# Altium PCB SEG_pressure gauge_up  V2.1.PcbDoc (part 4 of 5)
Units mm, origin at the board's own origin, x right, y up, seen from the top; angles counter-clockwise.
Board outline 67.74 x 67.74 mm, 2 copper layers (Top Layer, Bottom Layer); 36 components, 59 nets, 200 pads, 20 vias.
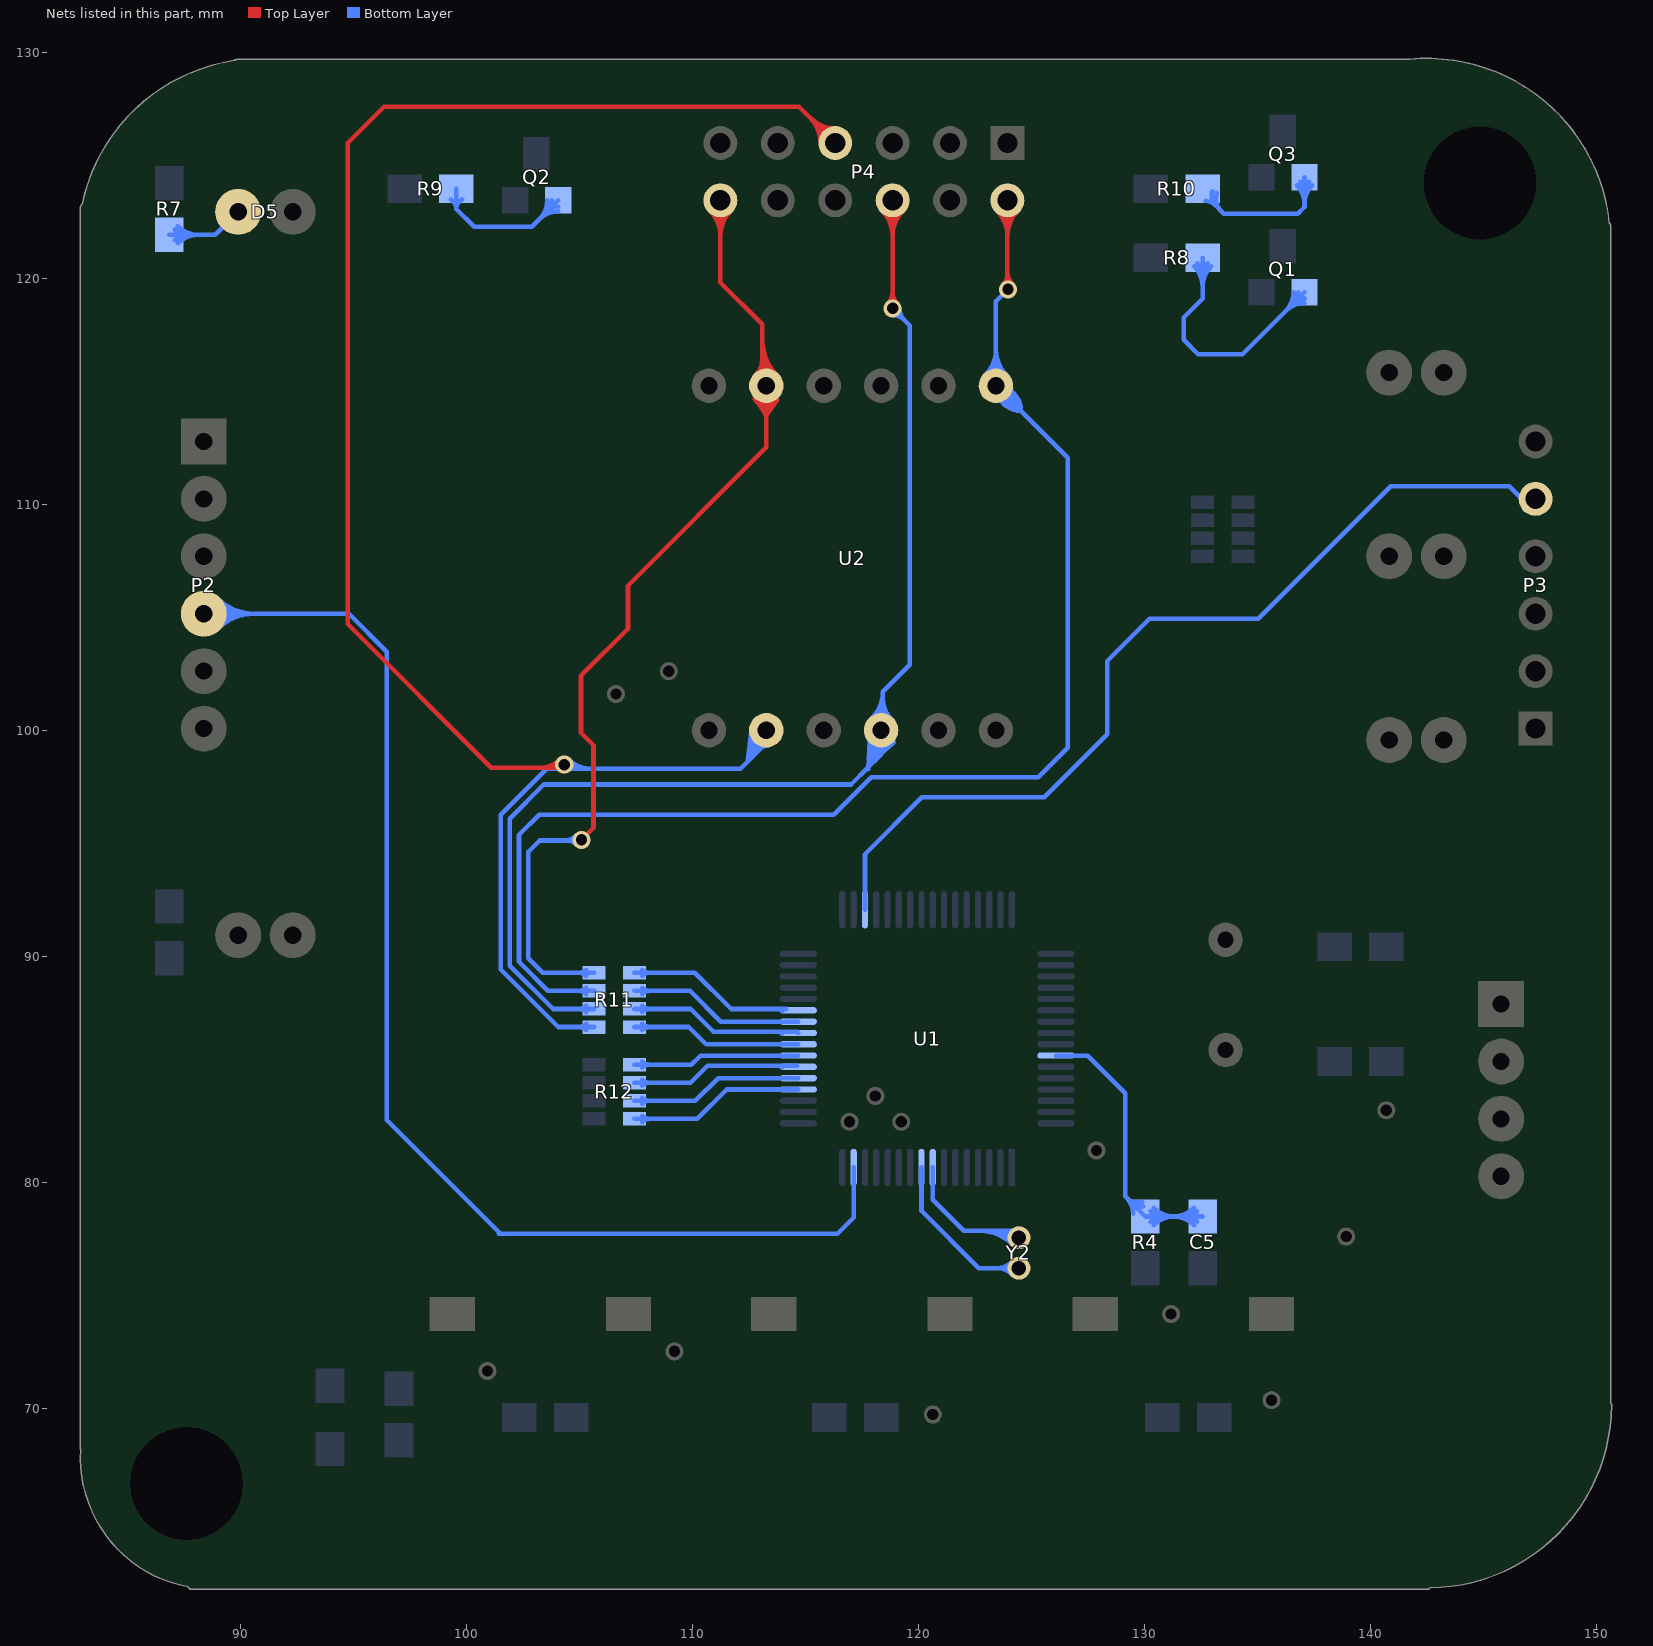
[diagram p4: the nets of this part, all layers, seen from the top]

## Via types
v1: diameter 0.8, hole 0.5, Top Layer to Bottom Layer, 20 vias

## Nets (pads, with @x,y where several pads share a name; then routed paths per layer and width w, separated by ;. In a path a pad name is that pad's centre, name@x,y a point inside that pad or via, vN(x,y) a via of type N, cw(c..) or ccw(c..) an arc to the next point about the centre after c; other vN are vias at no path point) (continued)
NetD5_1: D5.1 R7.2 | length 19.8
  Bottom Layer w0.203: R7.2@86.868,121.92 88.9,121.92 D5.1@89.916,122.936 ; R7.2@87.101,121.687 cw(c87.665,121.123) 87.665,121.92 ; R7.2@87.101,121.687 cw(c87.665,121.123) 87.665,121.92 ; R7.2@87.101,121.687 cw(c87.665,121.123) 87.665,121.92 ; R7.2@87.101,121.687 cw(c87.665,121.123) 87.665,121.92 ; R7.2@87.101,121.687 cw(c87.665,121.123) 87.665,121.92 ; R7.2@87.101,122.153 ccw(c87.665,122.717) 87.665,121.92 ; R7.2@87.101,122.153 ccw(c87.665,122.717) 87.665,121.92 ; R7.2@87.101,122.153 ccw(c87.665,122.717) 87.665,121.92 ; R7.2@87.101,122.153 ccw(c87.665,122.717) 87.665,121.92 ; R7.2@87.101,122.153 ccw(c87.665,122.717) 87.665,121.92 ; R7.2@87.245,121.543 cw(c88.156,120.632) 88.156,121.92 ; R7.2@87.245,121.543 cw(c88.156,120.632) 88.156,121.92 ; R7.2@87.245,121.543 cw(c88.156,120.632) 88.156,121.92 ; R7.2@87.245,121.543 cw(c88.156,120.632) 88.156,121.92 ; R7.2@87.245,121.543 cw(c88.156,120.632) 88.156,121.92 ; R7.2@87.245,122.297 ccw(c88.156,123.208) 88.156,121.92 ; R7.2@87.245,122.297 ccw(c88.156,123.208) 88.156,121.92 ; R7.2@87.245,122.297 ccw(c88.156,123.208) 88.156,121.92 ; R7.2@87.245,122.297 ccw(c88.156,123.208) 88.156,121.92 ; R7.2@87.245,122.297 ccw(c88.156,123.208) 88.156,121.92
NetQ1_1: Q1.1 R8.1 | length 35
  Bottom Layer w0.203: R8.1@132.588,120.904 132.588,119.101 131.75,118.262 131.75,117.272 132.385,116.637 134.353,116.637 Q1.1@137.096,119.38 ; R8.1@132.211,120.527 cw(c131.3,119.616) 132.588,119.616 ; R8.1@132.211,120.527 cw(c131.3,119.616) 132.588,119.616 ; R8.1@132.211,120.527 cw(c131.3,119.616) 132.588,119.616 ; R8.1@132.355,120.671 cw(c131.791,120.107) 132.588,120.107 ; R8.1@132.355,120.671 cw(c131.791,120.107) 132.588,120.107 ; R8.1@132.355,120.671 cw(c131.791,120.107) 132.588,120.107 ; 132.588,119.616 cw(c133.876,119.616) R8.1@132.965,120.527 ; 132.588,119.616 cw(c133.876,119.616) R8.1@132.965,120.527 ; 132.588,119.616 cw(c133.876,119.616) R8.1@132.965,120.527 ; 132.588,120.107 cw(c133.385,120.107) R8.1@132.821,120.671 ; 132.588,120.107 cw(c133.385,120.107) R8.1@132.821,120.671 ; 132.588,120.107 cw(c133.385,120.107) R8.1@132.821,120.671 ; 136.273,118.556 cw(c137.096,117.732) Q1.1@137.096,118.897 ; 136.273,118.556 ccw(c135.449,119.38) Q1.1@136.614,119.38 ; 136.273,118.556 cw(c137.096,117.732) Q1.1@137.096,118.897 ; 136.273,118.556 ccw(c135.449,119.38) Q1.1@136.614,119.38 ; 136.273,118.556 cw(c137.096,117.732) Q1.1@137.096,118.897 ; 136.273,118.556 ccw(c135.449,119.38) Q1.1@136.614,119.38 ; 136.273,118.556 cw(c137.096,117.732) Q1.1@137.096,118.897 ; 136.273,118.556 ccw(c135.449,119.38) Q1.1@136.614,119.38 ; 136.273,118.556 ccw(c135.449,119.38) Q1.1@136.614,119.38 ; 136.273,118.556 cw(c137.096,117.732) Q1.1@137.096,118.897 ; Q1.1@136.62,118.903 cw(c137.096,118.426) Q1.1@137.096,119.101 ; Q1.1@136.62,118.903 ccw(c136.143,119.38) Q1.1@136.817,119.38 ; Q1.1@136.62,118.903 cw(c137.096,118.426) Q1.1@137.096,119.101 ; Q1.1@136.62,118.903 ccw(c136.143,119.38) Q1.1@136.817,119.38 ; Q1.1@136.62,118.903 cw(c137.096,118.426) Q1.1@137.096,119.101 ; Q1.1@136.62,118.903 ccw(c136.143,119.38) Q1.1@136.817,119.38 ; Q1.1@136.62,118.903 cw(c137.096,118.426) Q1.1@137.096,119.101 ; Q1.1@136.62,118.903 ccw(c136.143,119.38) Q1.1@136.817,119.38 ; Q1.1@136.62,118.903 ccw(c136.143,119.38) Q1.1@136.817,119.38 ; Q1.1@136.62,118.903 cw(c137.096,118.426) Q1.1@137.096,119.101
NetQ2_1: Q2.1 R9.1 | length 25.8
  Bottom Layer w0.203: R9.1@99.568,123.952 99.568,123.063 ; Q2.1@104.076,123.444 102.908,122.276 100.355,122.276 99.568,123.063 ; R9.1@99.317,123.481 cw(c99.094,123.063) 99.568,123.063 ; R9.1@99.317,123.481 cw(c99.094,123.063) 99.568,123.063 ; R9.1@99.317,123.481 cw(c99.094,123.063) 99.568,123.063 ; R9.1@99.317,123.481 cw(c99.094,123.063) 99.568,123.063 ; R9.1@99.317,123.481 cw(c99.094,123.063) 99.568,123.063 ; 99.568,123.063 cw(c100.042,123.063) R9.1@99.819,123.481 ; 99.568,123.063 cw(c100.042,123.063) R9.1@99.819,123.481 ; 99.568,123.063 cw(c100.042,123.063) R9.1@99.819,123.481 ; 99.568,123.063 cw(c100.042,123.063) R9.1@99.819,123.481 ; 99.568,123.063 cw(c100.042,123.063) R9.1@99.819,123.481 ; 103.253,122.62 cw(c104.076,121.796) Q2.1@104.076,122.961 ; 103.253,122.62 ccw(c102.429,123.444) Q2.1@103.594,123.444 ; 103.253,122.62 cw(c104.076,121.796) Q2.1@104.076,122.961 ; 103.253,122.62 ccw(c102.429,123.444) Q2.1@103.594,123.444 ; 103.253,122.62 cw(c104.076,121.796) Q2.1@104.076,122.961 ; 103.253,122.62 ccw(c102.429,123.444) Q2.1@103.594,123.444 ; 103.253,122.62 cw(c104.076,121.796) Q2.1@104.076,122.961 ; 103.253,122.62 ccw(c102.429,123.444) Q2.1@103.594,123.444 ; 103.253,122.62 ccw(c102.429,123.444) Q2.1@103.594,123.444 ; 103.253,122.62 cw(c104.076,121.796) Q2.1@104.076,122.961 ; Q2.1@103.6,122.967 cw(c104.076,122.49) Q2.1@104.076,123.165 ; Q2.1@103.6,122.967 ccw(c103.123,123.444) Q2.1@103.797,123.444 ; Q2.1@103.6,122.967 cw(c104.076,122.49) Q2.1@104.076,123.165 ; Q2.1@103.6,122.967 ccw(c103.123,123.444) Q2.1@103.797,123.444 ; Q2.1@103.6,122.967 cw(c104.076,122.49) Q2.1@104.076,123.165 ; Q2.1@103.6,122.967 ccw(c103.123,123.444) Q2.1@103.797,123.444 ; Q2.1@103.6,122.967 cw(c104.076,122.49) Q2.1@104.076,123.165 ; Q2.1@103.6,122.967 ccw(c103.123,123.444) Q2.1@103.797,123.444 ; Q2.1@103.6,122.967 ccw(c103.123,123.444) Q2.1@103.797,123.444 ; Q2.1@103.6,122.967 cw(c104.076,122.49) Q2.1@104.076,123.165
NetQ3_1: Q3.1 R10.1 | length 30
  Bottom Layer w0.203: 133.096,123.292 133.528,122.86 136.804,122.86 137.096,123.152 Q3.1@137.096,124.46 ; R10.1@132.715,123.419 cw(c132.715,122.805) 133.149,123.239 ; R10.1@132.715,123.419 cw(c132.715,122.805) 133.149,123.239 ; R10.1@132.715,123.419 cw(c132.715,122.805) 133.149,123.239 ; R10.1@132.715,123.419 cw(c132.715,122.805) 133.149,123.239 ; R10.1@132.715,123.419 cw(c132.715,122.805) 133.149,123.239 ; R10.1@133.025,123.84 ccw(c133.577,123.64) 133.162,123.225 ; R10.1@133.025,123.84 ccw(c133.577,123.64) 133.162,123.225 ; R10.1@133.025,123.84 ccw(c133.577,123.64) 133.162,123.225 ; R10.1@133.025,123.84 ccw(c133.577,123.64) 133.162,123.225 ; R10.1@133.025,123.84 ccw(c133.577,123.64) 133.162,123.225 ; R10.1@133.217,123.77 ccw(c133.908,123.52) 133.388,123 ; R10.1@133.217,123.77 ccw(c133.908,123.52) 133.388,123 ; R10.1@133.217,123.77 ccw(c133.908,123.52) 133.388,123 ; R10.1@133.217,123.77 ccw(c133.908,123.52) 133.388,123 ; R10.1@133.217,123.77 ccw(c133.908,123.52) 133.388,123 ; Q3.1@136.755,124.119 cw(c135.931,123.295) 137.096,123.295 ; Q3.1@136.755,124.119 cw(c135.931,123.295) 137.096,123.295 ; Q3.1@136.755,124.119 cw(c135.931,123.295) 137.096,123.295 ; Q3.1@136.755,124.119 cw(c135.931,123.295) 137.096,123.295 ; Q3.1@136.755,124.119 cw(c135.931,123.295) 137.096,123.295 ; Q3.1@136.899,124.262 cw(c136.422,123.785) 137.096,123.785 ; Q3.1@136.899,124.262 cw(c136.422,123.785) 137.096,123.785 ; Q3.1@136.899,124.262 cw(c136.422,123.785) 137.096,123.785 ; Q3.1@136.899,124.262 cw(c136.422,123.785) 137.096,123.785 ; Q3.1@136.899,124.262 cw(c136.422,123.785) 137.096,123.785 ; 137.096,123.295 cw(c138.262,123.295) Q3.1@137.438,124.119 ; 137.096,123.295 cw(c138.262,123.295) Q3.1@137.438,124.119 ; 137.096,123.295 cw(c138.262,123.295) Q3.1@137.438,124.119 ; 137.096,123.295 cw(c138.262,123.295) Q3.1@137.438,124.119 ; 137.096,123.295 cw(c138.262,123.295) Q3.1@137.438,124.119 ; 137.096,123.785 cw(c137.771,123.785) Q3.1@137.294,124.262 ; 137.096,123.785 cw(c137.771,123.785) Q3.1@137.294,124.262 ; 137.096,123.785 cw(c137.771,123.785) Q3.1@137.294,124.262 ; 137.096,123.785 cw(c137.771,123.785) Q3.1@137.294,124.262 ; 137.096,123.785 cw(c137.771,123.785) Q3.1@137.294,124.262
NetU1_8: U1.8 Y2.2 | length 24
  Bottom Layer w0.203: U1.8@120.649,80.656 120.649,79.223 122.022,77.851 124.155,77.851 Y2.2@124.46,77.546 ; 122.743,77.851 cw(c122.743,75.829) Y2.2@124.173,77.259 ; 122.743,77.851 cw(c122.743,75.829) Y2.2@124.173,77.259 ; 122.743,77.851 cw(c122.743,75.829) Y2.2@124.173,77.259 ; 122.743,77.851 cw(c122.743,75.829) Y2.2@124.173,77.259 ; 122.743,77.851 cw(c122.743,75.829) Y2.2@124.173,77.259 ; 123.234,77.851 cw(c123.234,76.32) Y2.2@124.316,77.403 ; 123.234,77.851 cw(c123.234,76.32) Y2.2@124.316,77.403 ; 123.234,77.851 cw(c123.234,76.32) Y2.2@124.316,77.403 ; 123.234,77.851 cw(c123.234,76.32) Y2.2@124.316,77.403 ; 123.234,77.851 cw(c123.234,76.32) Y2.2@124.316,77.403 ; 123.724,77.851 cw(c123.724,76.81) Y2.2@124.46,77.546 ; 123.724,77.851 cw(c123.724,76.81) Y2.2@124.46,77.546 ; 123.724,77.851 cw(c123.724,76.81) Y2.2@124.46,77.546 ; 123.724,77.851 cw(c123.724,76.81) Y2.2@124.46,77.546 ; 123.724,77.851 cw(c123.724,76.81) Y2.2@124.46,77.546
NetU1_9: U1.9 Y2.1 | length 15
  Bottom Layer w0.203: U1.9@120.149,80.656 120.149,78.733 122.682,76.2 Y2.1@124.46,76.2 ; 123.479,76.2 cw(c123.479,75.219) Y2.1@124.173,75.913 ; 123.479,76.2 ccw(c123.479,77.181) Y2.1@124.173,76.487 ; 123.479,76.2 cw(c123.479,75.219) Y2.1@124.173,75.913 ; 123.479,76.2 ccw(c123.479,77.181) Y2.1@124.173,76.487 ; 123.479,76.2 cw(c123.479,75.219) Y2.1@124.173,75.913 ; 123.479,76.2 ccw(c123.479,77.181) Y2.1@124.173,76.487 ; 123.479,76.2 cw(c123.479,75.219) Y2.1@124.173,75.913 ; 123.479,76.2 ccw(c123.479,77.181) Y2.1@124.173,76.487 ; 123.479,76.2 ccw(c123.479,77.181) Y2.1@124.173,76.487 ; 123.479,76.2 cw(c123.479,75.219) Y2.1@124.173,75.913
P2.0: R12.2 U1.20 | length 8.5
  Bottom Layer w0.203: R12.2@107.442,82.804 110.236,82.804 111.538,84.106 U1.20@114.699,84.106 ; R12.2@107.79,82.664 cw(c108.129,82.325) 108.129,82.804 cw(c108.129,83.283) R12.2@107.79,82.944
P2.1: R12.4 U1.21 | length 8.4
  Bottom Layer w0.203: R12.4@107.442,83.604 110.147,83.604 111.149,84.606 U1.21@114.699,84.606 ; R12.4@107.79,83.464 cw(c108.129,83.125) 108.129,83.604 cw(c108.129,84.083) R12.4@107.79,83.744
P2.2: R12.6 U1.22 | length 8.5
  Bottom Layer w0.203: R12.6@107.442,84.404 109.931,84.404 110.691,85.164 U1.22@114.64,85.164 ; R12.6@107.79,84.264 cw(c108.129,83.925) 108.129,84.404 cw(c108.129,84.883) R12.6@107.79,84.544 ; 113.78,85.164 cw(c113.78,84.872) U1.22@113.986,85.079
P2.3: R12.8 U1.23 | length 8.2
  Bottom Layer w0.203: R12.8@107.442,85.204 109.969,85.204 110.371,85.606 U1.23@114.699,85.606 ; R12.8@107.79,85.064 cw(c108.129,84.725) 108.129,85.204 cw(c108.129,85.683) R12.8@107.79,85.344
P2.4: R11.2 U1.24 | length 8.3
  Bottom Layer w0.203: R11.2@107.442,86.868 109.855,86.868 110.617,86.106 U1.24@114.699,86.106 ; R11.2@107.79,86.728 cw(c108.129,86.389) 108.129,86.868 cw(c108.129,87.347) R11.2@107.79,87.008
P2.5: R11.4 U1.25 | length 8.7
  Bottom Layer w0.203: R11.4@107.442,87.668 109.944,87.668 110.948,86.664 114.641,86.664 U1.25@114.699,86.606 ; R11.4@107.79,87.528 cw(c108.129,87.189) 108.129,87.668 cw(c108.129,88.147) R11.4@107.79,87.808 ; 113.78,86.664 cw(c113.78,86.372) U1.25@113.986,86.579
P2.6: R11.6 U1.26 | length 8.6
  Bottom Layer w0.203: R11.6@107.442,88.468 109.906,88.468 111.268,87.106 U1.26@114.699,87.106 ; R11.6@107.79,88.328 cw(c108.129,87.989) 108.129,88.468 cw(c108.129,88.947) R11.6@107.79,88.608
P2.7: R11.8 U1.27 | length 8.4
  Bottom Layer w0.203: R11.8@107.442,89.268 110.122,89.268 111.726,87.664 U1.27@114.173,87.664 ; R11.8@107.79,89.128 cw(c108.129,88.789) 108.129,89.268 cw(c108.129,89.747) R11.8@107.79,89.408 ; 113.78,87.664 cw(c113.78,87.372) U1.27@113.986,87.579
PWM: P2.4 U1.15 | length 95.3
  Bottom Layer w0.203: P2.4@88.392,105.156 94.818,105.156 96.495,103.48 96.495,82.753 101.524,77.724 ; 101.448,77.724 101.524,77.724 ; U1.15@117.149,80.656 117.149,78.44 116.434,77.724 101.524,77.724 ; P2.4@88.751,104.797 cw(c89.618,103.93) 89.618,105.156 ; P2.4@88.751,104.797 cw(c89.618,103.93) 89.618,105.156 ; P2.4@88.751,104.797 cw(c89.618,103.93) 89.618,105.156 ; P2.4@88.751,104.797 cw(c89.618,103.93) 89.618,105.156 ; P2.4@88.751,104.797 cw(c89.618,103.93) 89.618,105.156 ; P2.4@88.751,105.515 ccw(c89.618,106.382) 89.618,105.156 ; P2.4@88.751,105.515 ccw(c89.618,106.382) 89.618,105.156 ; P2.4@88.751,105.515 ccw(c89.618,106.382) 89.618,105.156 ; P2.4@88.751,105.515 ccw(c89.618,106.382) 89.618,105.156 ; P2.4@88.751,105.515 ccw(c89.618,106.382) 89.618,105.156 ; P2.4@88.895,104.653 cw(c90.109,103.439) 90.109,105.156 ; P2.4@88.895,104.653 cw(c90.109,103.439) 90.109,105.156 ; P2.4@88.895,104.653 cw(c90.109,103.439) 90.109,105.156 ; P2.4@88.895,104.653 cw(c90.109,103.439) 90.109,105.156 ; P2.4@88.895,104.653 cw(c90.109,103.439) 90.109,105.156 ; P2.4@88.895,105.659 ccw(c90.109,106.873) 90.109,105.156 ; P2.4@88.895,105.659 ccw(c90.109,106.873) 90.109,105.156 ; P2.4@88.895,105.659 ccw(c90.109,106.873) 90.109,105.156 ; P2.4@88.895,105.659 ccw(c90.109,106.873) 90.109,105.156 ; P2.4@88.895,105.659 ccw(c90.109,106.873) 90.109,105.156 ; P2.4@89.039,104.509 cw(c90.6,102.948) 90.6,105.156 ; P2.4@89.039,104.509 cw(c90.6,102.948) 90.6,105.156 ; P2.4@89.039,104.509 cw(c90.6,102.948) 90.6,105.156 ; P2.4@89.039,104.509 cw(c90.6,102.948) 90.6,105.156 ; P2.4@89.039,104.509 cw(c90.6,102.948) 90.6,105.156 ; P2.4@89.039,105.803 ccw(c90.6,107.364) 90.6,105.156 ; P2.4@89.039,105.803 ccw(c90.6,107.364) 90.6,105.156 ; P2.4@89.039,105.803 ccw(c90.6,107.364) 90.6,105.156 ; P2.4@89.039,105.803 ccw(c90.6,107.364) 90.6,105.156 ; P2.4@89.039,105.803 ccw(c90.6,107.364) 90.6,105.156
RST: C5.2 R4.2 U1.58 | length 55.1
  Bottom Layer w0.203: U1.58@126.099,85.606 127.5,85.606 129.159,83.947 129.159,79.375 R4.2@130.048,78.486 C5.2@132.588,78.486 ; 129.223,79.311 ccw(c129.724,79.813) R4.2@129.909,79.128 ; 129.223,79.311 ccw(c129.724,79.813) R4.2@129.909,79.128 ; 129.223,79.311 ccw(c129.724,79.813) R4.2@129.909,79.128 ; 129.223,79.311 ccw(c129.724,79.813) R4.2@129.909,79.128 ; 129.223,79.311 ccw(c129.724,79.813) R4.2@129.909,79.128 ; 129.227,79.307 cw(c128.533,78.613) R4.2@129.515,78.613 ; 129.227,79.307 cw(c128.533,78.613) R4.2@129.515,78.613 ; 129.227,79.307 cw(c128.533,78.613) R4.2@129.515,78.613 ; 129.227,79.307 cw(c128.533,78.613) R4.2@129.515,78.613 ; 129.227,79.307 cw(c128.533,78.613) R4.2@129.515,78.613 ; R4.2@129.471,79.063 ccw(c129.83,79.422) R4.2@129.962,78.932 ; R4.2@129.471,79.063 ccw(c129.83,79.422) R4.2@129.962,78.932 ; R4.2@129.471,79.063 ccw(c129.83,79.422) R4.2@129.962,78.932 ; R4.2@129.471,79.063 ccw(c129.83,79.422) R4.2@129.962,78.932 ; R4.2@129.471,79.063 ccw(c129.83,79.422) R4.2@129.962,78.932 ; R4.2@130.281,78.253 cw(c130.845,77.689) 130.845,78.486 ; R4.2@130.281,78.253 cw(c130.845,77.689) 130.845,78.486 ; R4.2@130.281,78.253 cw(c130.845,77.689) 130.845,78.486 ; R4.2@130.281,78.253 cw(c130.845,77.689) 130.845,78.486 ; R4.2@130.281,78.253 cw(c130.845,77.689) 130.845,78.486 ; R4.2@130.281,78.719 ccw(c130.845,79.283) 130.845,78.486 ; R4.2@130.281,78.719 ccw(c130.845,79.283) 130.845,78.486 ; R4.2@130.281,78.719 ccw(c130.845,79.283) 130.845,78.486 ; R4.2@130.281,78.719 ccw(c130.845,79.283) 130.845,78.486 ; R4.2@130.281,78.719 ccw(c130.845,79.283) 130.845,78.486 ; R4.2@130.425,78.109 cw(c131.336,77.198) 131.336,78.486 ; R4.2@130.425,78.109 cw(c131.336,77.198) 131.336,78.486 ; R4.2@130.425,78.109 cw(c131.336,77.198) 131.336,78.486 ; R4.2@130.425,78.109 cw(c131.336,77.198) 131.336,78.486 ; R4.2@130.425,78.109 cw(c131.336,77.198) 131.336,78.486 ; R4.2@130.425,78.863 ccw(c131.336,79.774) 131.336,78.486 ; R4.2@130.425,78.863 ccw(c131.336,79.774) 131.336,78.486 ; R4.2@130.425,78.863 ccw(c131.336,79.774) 131.336,78.486 ; R4.2@130.425,78.863 ccw(c131.336,79.774) 131.336,78.486 ; R4.2@130.425,78.863 ccw(c131.336,79.774) 131.336,78.486 ; 131.3,78.486 cw(c131.3,77.198) C5.2@132.211,78.109 ; 131.3,78.486 ccw(c131.3,79.774) C5.2@132.211,78.863 ; 131.3,78.486 cw(c131.3,77.198) C5.2@132.211,78.109 ; 131.3,78.486 ccw(c131.3,79.774) C5.2@132.211,78.863 ; 131.3,78.486 cw(c131.3,77.198) C5.2@132.211,78.109 ; 131.3,78.486 ccw(c131.3,79.774) C5.2@132.211,78.863 ; 131.3,78.486 cw(c131.3,77.198) C5.2@132.211,78.109 ; 131.3,78.486 ccw(c131.3,79.774) C5.2@132.211,78.863 ; 131.3,78.486 ccw(c131.3,79.774) C5.2@132.211,78.863 ; 131.3,78.486 cw(c131.3,77.198) C5.2@132.211,78.109 ; 131.791,78.486 cw(c131.791,77.689) C5.2@132.355,78.253 ; 131.791,78.486 ccw(c131.791,79.283) C5.2@132.355,78.719 ; 131.791,78.486 cw(c131.791,77.689) C5.2@132.355,78.253 ; 131.791,78.486 ccw(c131.791,79.283) C5.2@132.355,78.719 ; 131.791,78.486 cw(c131.791,77.689) C5.2@132.355,78.253 ; 131.791,78.486 ccw(c131.791,79.283) C5.2@132.355,78.719 ; 131.791,78.486 cw(c131.791,77.689) C5.2@132.355,78.253 ; 131.791,78.486 ccw(c131.791,79.283) C5.2@132.355,78.719 ; 131.791,78.486 ccw(c131.791,79.283) C5.2@132.355,78.719 ; 131.791,78.486 cw(c131.791,77.689) C5.2@132.355,78.253
RX: P3.5 U1.35 | length 41.7
  Bottom Layer w0.203: U1.35@117.649,92.056 117.649,94.51 120.167,97.028 125.574,97.028 128.372,99.826 128.372,103.063 130.236,104.927 135.052,104.927 140.919,110.795 146.152,110.795 146.71,110.236 P3.5@147.32,110.236 P3.5@146.837,109.753
SEG1: P4.12 R11.7 U2.a | length 104
  Top Layer w0.203: v1@105.207,95.25 v1(105.105,95.148) 105.639,95.682 105.639,99.339 105.086,99.892 105.086,102.419 105.207,102.54 ; 105.245,102.578 105.207,102.54 ; P4.12@111.252,123.444 111.252,119.812 113.106,117.958 113.106,115.418 U2.a@113.284,115.24 ; 112.971,114.403 113.243,113.984 ; 113.513,114.503 113.284,114.275 ; 105.207,102.54 107.163,104.496 107.163,106.401 113.284,112.522 113.284,113.894 ; P4.12@110.794,122.986 cw(c109.687,121.879) 111.252,121.879 ; P4.12@110.794,122.986 cw(c109.687,121.879) 111.252,121.879 ; P4.12@110.794,122.986 cw(c109.687,121.879) 111.252,121.879 ; P4.12@110.794,122.986 cw(c109.687,121.879) 111.252,121.879 ; P4.12@110.794,122.986 cw(c109.687,121.879) 111.252,121.879 ; P4.12@110.937,123.129 cw(c110.177,122.369) 111.252,122.369 ; P4.12@110.937,123.129 cw(c110.177,122.369) 111.252,122.369 ; P4.12@110.937,123.129 cw(c110.177,122.369) 111.252,122.369 ; P4.12@110.937,123.129 cw(c110.177,122.369) 111.252,122.369 ; P4.12@110.937,123.129 cw(c110.177,122.369) 111.252,122.369 ; 111.252,121.879 cw(c112.817,121.879) P4.12@111.71,122.986 ; 111.252,121.879 cw(c112.817,121.879) P4.12@111.71,122.986 ; 111.252,121.879 cw(c112.817,121.879) P4.12@111.71,122.986 ; 111.252,121.879 cw(c112.817,121.879) P4.12@111.71,122.986 ; 111.252,121.879 cw(c112.817,121.879) P4.12@111.71,122.986 ; 111.252,122.369 cw(c112.327,122.369) P4.12@111.567,123.129 ; 111.252,122.369 cw(c112.327,122.369) P4.12@111.567,123.129 ; 111.252,122.369 cw(c112.327,122.369) P4.12@111.567,123.129 ; 111.252,122.369 cw(c112.327,122.369) P4.12@111.567,123.129 ; 111.252,122.369 cw(c112.327,122.369) P4.12@111.567,123.129 ; U2.a@112.817,115.707 ccw(c112.119,116.405) 113.106,116.405 ; U2.a@112.817,115.707 ccw(c112.119,116.405) 113.106,116.405 ; U2.a@112.817,115.707 ccw(c112.119,116.405) 113.106,116.405 ; U2.a@112.817,115.707 ccw(c112.119,116.405) 113.106,116.405 ; U2.a@112.817,115.707 ccw(c112.119,116.405) 113.106,116.405 ; U2.a@113.045,114.625 cw(c112.909,114.275) 113.284,114.275 ; U2.a@113.045,114.625 cw(c112.909,114.275) 113.284,114.275 ; U2.a@113.045,114.625 cw(c112.909,114.275) 113.284,114.275 ; U2.a@113.045,114.625 cw(c112.909,114.275) 113.284,114.275 ; U2.a@113.045,114.625 cw(c112.909,114.275) 113.284,114.275 ; 113.082,114.334 113.167,114.15 ; 113.082,114.334 113.284,114.122 ; 113.082,114.334 113.005,114.503 113.035,114.493 113.157,114.452 113.284,114.122 ; 113.082,114.334 112.776,114.656 113.167,114.15 ; 113.106,116.282 ccw(c114.326,116.282) U2.a@113.464,115.42 ; 113.106,116.282 ccw(c114.326,116.282) U2.a@113.464,115.42 ; 113.106,116.282 ccw(c114.326,116.282) U2.a@113.464,115.42 ; 113.106,116.282 ccw(c114.326,116.282) U2.a@113.464,115.42 ; 113.106,116.282 ccw(c114.326,116.282) U2.a@113.464,115.42 ; 113.106,116.773 ccw(c114.817,116.773) U2.a@113.607,115.563 ; 113.106,116.773 ccw(c114.817,116.773) U2.a@113.607,115.563 ; 113.106,116.773 ccw(c114.817,116.773) U2.a@113.607,115.563 ; 113.106,116.773 ccw(c114.817,116.773) U2.a@113.607,115.563 ; 113.106,116.773 ccw(c114.817,116.773) U2.a@113.607,115.563 ; 113.106,117.264 ccw(c115.308,117.264) U2.a@113.751,115.707 ; 113.106,117.264 ccw(c115.308,117.264) U2.a@113.751,115.707 ; 113.106,117.264 ccw(c115.308,117.264) U2.a@113.751,115.707 ; 113.106,117.264 ccw(c115.308,117.264) U2.a@113.751,115.707 ; 113.106,117.264 ccw(c115.308,117.264) U2.a@113.751,115.707 ; 113.167,114.15 113.243,113.984 ; 113.243,113.984 113.284,113.894 ; 113.284,113.894 113.284,113.919 ; 113.284,113.919 113.284,114.122 ; 113.284,113.919 113.767,114.605 U2.a@113.284,115.24 ; 113.284,114.122 113.284,114.275 ; 113.284,114.275 cw(c113.659,114.275) U2.a@113.523,114.625 ; 113.284,114.275 cw(c113.659,114.275) U2.a@113.523,114.625 ; 113.284,114.275 cw(c113.659,114.275) U2.a@113.523,114.625 ; 113.284,114.275 cw(c113.659,114.275) U2.a@113.523,114.625 ; 113.284,114.275 cw(c113.659,114.275) U2.a@113.523,114.625 ; 113.284,114.275 U2.a@113.284,115.24
  Bottom Layer w0.203: v1@104.775,95.123 103.251,95.123 102.743,94.615 102.743,89.916 103.391,89.268 R11.7@105.664,89.268 ; R11.7@105.316,89.128 ccw(c104.977,88.789) 104.977,89.268 ccw(c104.977,89.747) R11.7@105.316,89.408 ; 104.323,95.123 ccw(c104.323,95.93) v1@104.894,95.359 ; 104.323,95.123 ccw(c104.323,95.93) v1@104.894,95.359 ; 104.323,95.123 ccw(c104.323,95.93) v1@104.894,95.359 ; 104.323,95.123 ccw(c104.323,95.93) v1@104.894,95.359 ; 104.323,95.123 ccw(c104.323,95.93) v1@104.894,95.359 ; 104.446,95.123 cw(c104.446,94.489) v1@104.894,94.937 ; 104.446,95.123 cw(c104.446,94.489) v1@104.894,94.937 ; 104.446,95.123 cw(c104.446,94.489) v1@104.894,94.937 ; 104.446,95.123 cw(c104.446,94.489) v1@104.894,94.937 ; 104.446,95.123 cw(c104.446,94.489) v1@104.894,94.937
SEG2: P4.7 R11.5 U2.b | length 136.5
  Top Layer w0.203: v1@123.952,119.431 123.952,119.507 P4.7@123.952,123.444 ; P4.7@123.494,122.986 cw(c122.387,121.879) 123.952,121.879 ; P4.7@123.494,122.986 cw(c122.387,121.879) 123.952,121.879 ; P4.7@123.494,122.986 cw(c122.387,121.879) 123.952,121.879 ; P4.7@123.637,123.129 cw(c122.877,122.369) 123.952,122.369 ; P4.7@123.637,123.129 cw(c122.877,122.369) 123.952,122.369 ; P4.7@123.637,123.129 cw(c122.877,122.369) 123.952,122.369 ; v1@123.766,119.718 ccw(c123.318,120.166) 123.952,120.166 ; v1@123.766,119.718 ccw(c123.318,120.166) 123.952,120.166 ; v1@123.766,119.718 ccw(c123.318,120.166) 123.952,120.166 ; 123.952,120.289 ccw(c124.759,120.289) v1@124.188,119.718 ; 123.952,120.289 ccw(c124.759,120.289) v1@124.188,119.718 ; 123.952,120.289 ccw(c124.759,120.289) v1@124.188,119.718 ; 123.952,121.879 cw(c125.517,121.879) P4.7@124.41,122.986 ; 123.952,121.879 cw(c125.517,121.879) P4.7@124.41,122.986 ; 123.952,121.879 cw(c125.517,121.879) P4.7@124.41,122.986 ; 123.952,122.369 cw(c125.027,122.369) P4.7@124.267,123.129 ; 123.952,122.369 cw(c125.027,122.369) P4.7@124.267,123.129 ; 123.952,122.369 cw(c125.027,122.369) P4.7@124.267,123.129
  Bottom Layer w0.203: R11.5@105.316,88.328 ccw(c104.977,87.989) 104.977,88.468 ccw(c104.977,88.947) R11.5@105.316,88.608 ; R11.5@105.664,88.468 103.621,88.468 102.34,89.749 102.34,95.377 103.229,96.266 116.272,96.266 117.923,97.917 125.313,97.917 126.619,99.223 126.619,112.065 124.549,114.135 ; v1(123.977,119.507) 123.444,118.974 U2.b@123.444,115.24 ; 124.206,114.224 124.02,114.472 ; U2.b@122.977,115.707 ccw(c121.849,116.835) 123.444,116.835 ; U2.b@122.977,115.707 ccw(c121.849,116.835) 123.444,116.835 ; U2.b@122.977,115.707 ccw(c121.849,116.835) 123.444,116.835 ; U2.b@123.121,115.563 ccw(c122.34,116.344) 123.444,116.344 ; U2.b@123.121,115.563 ccw(c122.34,116.344) 123.444,116.344 ; U2.b@123.121,115.563 ccw(c122.34,116.344) 123.444,116.344 ; U2.b@123.444,115.24 ccw(c124.13,115.24) 123.938,114.581 ; U2.b@123.444,115.24 ccw(c124.13,115.24) 123.938,114.581 ; U2.b@123.444,115.24 ccw(c124.13,115.24) 123.938,114.581 ; U2.b@123.444,115.24 ccw(c124.244,115.24) 124.02,114.472 ; U2.b@123.444,115.24 ccw(c124.244,115.24) 124.02,114.472 ; U2.b@123.444,115.24 ccw(c124.244,115.24) 124.02,114.472 ; U2.b@123.444,115.24 ccw(c124.549,115.24) 124.549,114.135 ; U2.b@123.444,115.24 ccw(c124.549,115.24) 124.549,114.135 ; U2.b@123.444,115.24 ccw(c124.13,115.24) 123.938,114.581 ; U2.b@123.444,115.24 ccw(c124.244,115.24) 124.02,114.472 ; U2.b@123.444,115.24 ccw(c124.549,115.24) 124.549,114.135 ; U2.b@123.444,115.24 cw(c123.444,114.135) 124.549,114.135 ; U2.b@123.444,115.24 ccw(c124.549,115.24) 124.549,114.135 ; U2.b@123.444,115.24 cw(c123.444,114.135) 124.549,114.135 ; U2.b@123.444,115.24 cw(c123.444,114.135) 124.549,114.135 ; U2.b@123.444,115.24 cw(c123.444,114.135) 124.549,114.135 ; U2.b@123.444,115.24 cw(c123.444,114.135) 124.549,114.135 ; U2.b@123.444,115.24 cw(c123.444,114.135) 124.549,114.135 ; U2.b@123.444,115.24 cw(c123.444,114.135) 124.549,114.135 ; U2.b@123.444,115.24 cw(c123.444,114.135) 124.549,114.135 ; U2.b@123.444,115.24 123.938,114.581 ; U2.b@123.444,115.24 124.13,114.554 ; U2.b@123.444,115.24 124.435,114.529 ; 123.444,116.343 ccw(c124.547,116.343) U2.b@123.767,115.563 ; 123.444,116.343 ccw(c124.547,116.343) U2.b@123.767,115.563 ; 123.444,116.343 ccw(c124.547,116.343) U2.b@123.767,115.563 ; 123.444,116.834 ccw(c125.038,116.834) U2.b@123.911,115.707 ; 123.444,116.834 ccw(c125.038,116.834) U2.b@123.911,115.707 ; 123.444,116.834 ccw(c125.038,116.834) U2.b@123.911,115.707 ; U2.b@123.609,114.814 cw(c123.808,114.3) 124.13,114.748 ; U2.b@123.609,114.814 cw(c123.808,114.3) 124.13,114.748 ; U2.b@123.609,114.814 cw(c123.808,114.3) 124.13,114.748 ; U2.b@123.609,114.814 cw(c123.808,114.3) 124.13,114.748 ; U2.b@123.609,114.814 cw(c123.808,114.3) 124.13,114.748 ; U2.b@123.683,114.624 cw(c123.97,113.882) 124.435,114.529 ; U2.b@123.683,114.624 cw(c123.97,113.882) 124.435,114.529 ; U2.b@123.683,114.624 cw(c123.97,113.882) 124.435,114.529 ; U2.b@123.683,114.624 cw(c123.97,113.882) 124.435,114.529 ; U2.b@123.683,114.624 cw(c123.97,113.882) 124.435,114.529 ; U2.b@123.901,115.22 ccw(c124.451,115.195) 124.13,114.748 ; U2.b@123.901,115.22 ccw(c124.451,115.195) 124.13,114.748 ; U2.b@123.901,115.22 ccw(c124.451,115.195) 124.13,114.748 ; U2.b@123.901,115.22 ccw(c124.451,115.195) 124.13,114.748 ; U2.b@123.901,115.22 ccw(c124.451,115.195) 124.13,114.748 ; 123.938,114.581 ccw(c124.13,115.24) 124.13,114.554 ; 123.938,114.581 ccw(c124.13,115.24) 124.13,114.554 ; 123.938,114.581 ccw(c124.13,115.24) 124.13,114.554 ; 123.938,114.581 ccw(c124.13,115.24) 124.13,114.554 ; 123.938,114.581 124.02,114.472 ; 124.02,114.472 ccw(c124.244,115.24) 124.244,114.44 ; 124.02,114.472 ccw(c124.244,115.24) 124.244,114.44 ; 124.02,114.472 ccw(c124.244,115.24) 124.244,114.44 ; 124.02,114.472 ccw(c124.244,115.24) 124.244,114.44 ; U2.b@124.104,115.211 ccw(c124.899,115.175) 124.435,114.529 ; U2.b@124.104,115.211 ccw(c124.899,115.175) 124.435,114.529 ; U2.b@124.104,115.211 ccw(c124.899,115.175) 124.435,114.529 ; U2.b@124.104,115.211 ccw(c124.899,115.175) 124.435,114.529 ; U2.b@124.104,115.211 ccw(c124.899,115.175) 124.435,114.529 ; 124.13,114.554 124.244,114.44 ; 124.244,114.44 124.549,114.135
SEG3: P4.9 R11.3 U2.c | length 135.2
  Top Layer w0.203: v1@118.872,118.593 v1(118.872,118.669) P4.9@118.872,123.444 ; P4.9@118.414,122.986 cw(c117.307,121.879) 118.872,121.879 ; P4.9@118.414,122.986 cw(c117.307,121.879) 118.872,121.879 ; P4.9@118.414,122.986 cw(c117.307,121.879) 118.872,121.879 ; P4.9@118.557,123.129 cw(c117.797,122.369) 118.872,122.369 ; P4.9@118.557,123.129 cw(c117.797,122.369) 118.872,122.369 ; P4.9@118.557,123.129 cw(c117.797,122.369) 118.872,122.369 ; v1@118.661,118.88 ccw(c118.152,119.389) 118.872,119.389 ; v1@118.661,118.88 ccw(c118.152,119.389) 118.872,119.389 ; v1@118.661,118.88 ccw(c118.152,119.389) 118.872,119.389 ; 118.872,119.389 ccw(c119.592,119.389) v1@119.083,118.88 ; 118.872,119.389 ccw(c119.592,119.389) v1@119.083,118.88 ; 118.872,119.389 ccw(c119.592,119.389) v1@119.083,118.88 ; 118.872,121.879 cw(c120.437,121.879) P4.9@119.33,122.986 ; 118.872,121.879 cw(c120.437,121.879) P4.9@119.33,122.986 ; 118.872,121.879 cw(c120.437,121.879) P4.9@119.33,122.986 ; 118.872,122.369 cw(c119.947,122.369) P4.9@119.187,123.129 ; 118.872,122.369 cw(c119.947,122.369) P4.9@119.187,123.129 ; 118.872,122.369 cw(c119.947,122.369) P4.9@119.187,123.129
  Bottom Layer w0.203: R11.3@105.316,87.528 ccw(c104.977,87.189) 104.977,87.668 ccw(c104.977,88.147) R11.3@105.316,87.808 ; R11.3@105.664,87.668 103.851,87.668 101.937,89.582 101.937,96.092 103.443,97.598 117.029,97.598 117.792,98.361 ; U2.c@117.778,99.696 cw(c116.362,98.962) 117.882,98.48 cw(c119.402,97.998) U2.c@118.668,99.414 ; 117.788,98.279 cw(c120.008,98.145) U2.c@118.532,99.81 ; 117.817,98.769 cw(c119.548,98.664) U2.c@118.398,99.962 ; 117.847,99.258 cw(c119.088,99.184) U2.c@118.263,100.114 ; U2.c@117.958,99.79 cw(c116.978,99.281) 118.03,98.948 cw(c119.083,98.614) U2.c@118.574,99.594 ; 117.983,99.314 117.958,99.111 117.856,99.416 117.792,98.361 ; v1(118.872,118.669) 119.634,117.907 119.634,102.895 118.44,101.702 ; 118.923,99.466 118.878,99.426 118.364,98.967 ; 117.792,98.361 117.869,98.438 ; 117.869,98.438 U2.c@118.364,100 ; 117.869,98.438 118.148,98.717 ; U2.c@117.891,99.539 cw(c117.21,98.875) 118.148,98.717 ; U2.c@117.891,99.539 cw(c117.21,98.875) 118.148,98.717 ; U2.c@117.891,99.539 cw(c117.21,98.875) 118.148,98.717 ; U2.c@117.891,99.539 cw(c117.21,98.875) 118.148,98.717 ; U2.c@117.891,99.539 cw(c117.21,98.875) 118.148,98.717 ; U2.c@117.912,100.482 ccw(c116.767,101.701) 118.44,101.701 ; U2.c@117.912,100.482 ccw(c116.767,101.701) 118.44,101.701 ; U2.c@117.912,100.482 ccw(c116.767,101.701) 118.44,101.701 ; U2.c@117.912,100.482 ccw(c116.767,101.701) 118.44,101.701 ; U2.c@117.912,100.482 ccw(c116.767,101.701) 118.44,101.701 ; U2.c@118.037,99.681 cw(c117.565,99.221) 118.215,99.112 ; U2.c@118.037,99.681 cw(c117.565,99.221) 118.215,99.112 ; U2.c@118.037,99.681 cw(c117.565,99.221) 118.215,99.112 ; U2.c@118.037,99.681 cw(c117.565,99.221) 118.215,99.112 ; U2.c@118.037,99.681 cw(c117.565,99.221) 118.215,99.112 ; U2.c@118.051,100.333 ccw(c117.208,101.232) 118.44,101.232 ; U2.c@118.051,100.333 ccw(c117.208,101.232) 118.44,101.232 ; U2.c@118.051,100.333 ccw(c117.208,101.232) 118.44,101.232 ; U2.c@118.051,100.333 ccw(c117.208,101.232) 118.44,101.232 ; U2.c@118.051,100.333 ccw(c117.208,101.232) 118.44,101.232 ; U2.c@118.115,99.389 cw(c117.963,99.017) 118.364,99.017 ; U2.c@118.115,99.389 cw(c117.963,99.017) 118.364,99.017 ; U2.c@118.115,99.389 cw(c117.963,99.017) 118.364,99.017 ; U2.c@118.115,99.389 cw(c117.963,99.017) 118.364,99.017 ; U2.c@118.115,99.389 cw(c117.963,99.017) 118.364,99.017 ; 118.148,98.717 cw(c119.086,98.559) U2.c@118.66,99.41 ; 118.148,98.717 cw(c119.086,98.559) U2.c@118.66,99.41 ; 118.148,98.717 cw(c119.086,98.559) U2.c@118.66,99.41 ; 118.148,98.717 cw(c119.086,98.559) U2.c@118.66,99.41 ; 118.148,98.717 cw(c119.086,98.559) U2.c@118.66,99.41 ; 118.148,98.717 118.262,98.875 ; 118.148,98.717 118.288,98.857 ; 118.148,98.717 U2.c@118.364,100 ; U2.c@118.19,100.185 ccw(c117.648,100.763) 118.44,100.763 ; U2.c@118.19,100.185 ccw(c117.648,100.763) 118.44,100.763 ; U2.c@118.19,100.185 ccw(c117.648,100.763) 118.44,100.763 ; U2.c@118.19,100.185 ccw(c117.648,100.763) 118.44,100.763 ; U2.c@118.19,100.185 ccw(c117.648,100.763) 118.44,100.763 ; 118.215,99.112 cw(c118.864,99.003) U2.c@118.569,99.591 ; 118.215,99.112 cw(c118.864,99.003) U2.c@118.569,99.591 ; 118.215,99.112 cw(c118.864,99.003) U2.c@118.569,99.591 ; 118.215,99.112 cw(c118.864,99.003) U2.c@118.569,99.591 ; 118.215,99.112 cw(c118.864,99.003) U2.c@118.569,99.591 ; 118.262,98.875 118.364,99.017 ; 118.262,98.875 118.353,98.957 ; 118.288,98.857 118.364,98.933 118.364,98.967 ; 118.288,98.857 118.353,98.957 ; 118.353,98.957 118.364,98.974 ; 118.353,98.957 118.364,98.967 ; 118.364,98.967 118.364,98.974 ; 118.364,98.974 118.669,99.441 118.364,99.017 ; 118.364,98.974 118.364,99.017 ; 118.364,99.017 cw(c118.765,99.017) U2.c@118.613,99.389 ; 118.364,99.017 cw(c118.765,99.017) U2.c@118.613,99.389 ; 118.364,99.017 cw(c118.765,99.017) U2.c@118.613,99.389 ; 118.364,99.017 cw(c118.765,99.017) U2.c@118.613,99.389 ; 118.364,99.017 cw(c118.765,99.017) U2.c@118.613,99.389 ; 118.364,99.017 U2.c@118.364,100 ; U2.c@118.364,100 118.44,100.076 118.44,101.702 ; 118.44,100.92 ccw(c119.284,100.92) U2.c@118.687,100.323 ; 118.44,100.92 ccw(c119.284,100.92) U2.c@118.687,100.323 ; 118.44,100.92 ccw(c119.284,100.92) U2.c@118.687,100.323 ; 118.44,100.92 ccw(c119.284,100.92) U2.c@118.687,100.323 ; 118.44,100.92 ccw(c119.284,100.92) U2.c@118.687,100.323 ; 118.44,101.41 ccw(c119.774,101.41) U2.c@118.831,100.467 ; 118.44,101.41 ccw(c119.774,101.41) U2.c@118.831,100.467 ; 118.44,101.41 ccw(c119.774,101.41) U2.c@118.831,100.467 ; 118.44,101.41 ccw(c119.774,101.41) U2.c@118.831,100.467 ; 118.44,101.41 ccw(c119.774,101.41) U2.c@118.831,100.467 ; v1@118.872,118.37 cw(c118.872,117.65) 119.381,118.159 ; v1@118.872,118.37 cw(c118.872,117.65) 119.381,118.159 ; v1@118.872,118.37 cw(c118.872,117.65) 119.381,118.159 ; v1@118.872,118.37 cw(c118.872,117.65) 119.381,118.159 ; v1@118.872,118.37 cw(c118.872,117.65) 119.381,118.159 ; v1@119.17,118.669 ccw(c119.891,118.669) 119.381,118.159 ; v1@119.17,118.669 ccw(c119.891,118.669) 119.381,118.159 ; v1@119.17,118.669 ccw(c119.891,118.669) 119.381,118.159 ; v1@119.17,118.669 ccw(c119.891,118.669) 119.381,118.159 ; v1@119.17,118.669 ccw(c119.891,118.669) 119.381,118.159
SEG4: P4.4 R11.1 U2.d | length 206.6
  Top Layer w0.203: v1(104.343,98.476) 104.216,98.349 101.117,98.349 94.767,104.699 94.767,125.984 96.368,127.584 114.732,127.584 P4.4@116.332,125.984 ; 103.316,98.349 ccw(c103.316,99.503) v1@104.132,98.687 ; 103.316,98.349 ccw(c103.316,99.503) v1@104.132,98.687 ; 103.316,98.349 ccw(c103.316,99.503) v1@104.132,98.687 ; 103.316,98.349 ccw(c103.316,99.503) v1@104.132,98.687 ; 103.316,98.349 ccw(c103.316,99.503) v1@104.132,98.687 ; 103.807,98.349 ccw(c103.807,99.012) v1@104.276,98.543 ; 103.807,98.349 ccw(c103.807,99.012) v1@104.276,98.543 ; 103.807,98.349 ccw(c103.807,99.012) v1@104.276,98.543 ; 103.807,98.349 ccw(c103.807,99.012) v1@104.276,98.543 ; 103.807,98.349 ccw(c103.807,99.012) v1@104.276,98.543 ; 103.929,98.349 cw(c103.929,98.062) v1@104.132,98.265 ; 103.929,98.349 cw(c103.929,98.062) v1@104.132,98.265 ; 103.929,98.349 cw(c103.929,98.062) v1@104.132,98.265 ; 103.929,98.349 cw(c103.929,98.062) v1@104.132,98.265 ; 103.929,98.349 cw(c103.929,98.062) v1@104.132,98.265 ; 115.225,127.091 cw(c114.118,125.984) P4.4@115.684,125.984 ; 115.225,127.091 ccw(c116.332,128.198) P4.4@116.332,126.632 ; 115.225,127.091 cw(c114.118,125.984) P4.4@115.684,125.984 ; 115.225,127.091 ccw(c116.332,128.198) P4.4@116.332,126.632 ; 115.225,127.091 ccw(c116.332,128.198) P4.4@116.332,126.632 ; 115.225,127.091 cw(c114.118,125.984) P4.4@115.684,125.984 ; 115.572,126.744 cw(c114.812,125.984) P4.4@115.887,125.984 ; 115.572,126.744 ccw(c116.332,127.504) P4.4@116.332,126.429 ; 115.572,126.744 cw(c114.812,125.984) P4.4@115.887,125.984 ; 115.572,126.744 ccw(c116.332,127.504) P4.4@116.332,126.429 ; 115.572,126.744 ccw(c116.332,127.504) P4.4@116.332,126.429 ; 115.572,126.744 cw(c114.812,125.984) P4.4@115.887,125.984
  Bottom Layer w0.203: R11.1@105.316,86.728 ccw(c104.977,86.389) 104.977,86.868 ccw(c104.977,87.347) R11.1@105.316,87.008 ; R11.1@105.664,86.868 104.08,86.868 101.533,89.415 101.533,96.259 103.572,98.298 ; U2.d@112.624,99.924 112.473,98.63 ; 103.572,98.298 ccw(c103.572,98.862) v1@104.076,98.609 ; 103.572,98.298 ccw(c103.572,98.862) v1@104.076,98.609 ; 103.572,98.298 ccw(c103.572,98.862) v1@104.076,98.609 ; 103.572,98.298 ccw(c103.572,98.862) v1@104.076,98.609 ; 103.572,98.298 ccw(c103.572,98.862) v1@104.076,98.609 ; 103.572,98.298 104.343,98.298 112.141,98.298 112.473,98.63 ; 103.901,98.298 ccw(c103.901,98.697) v1@104.258,98.518 ; 103.901,98.298 ccw(c103.901,98.697) v1@104.258,98.518 ; 103.901,98.298 ccw(c103.901,98.697) v1@104.258,98.518 ; 103.901,98.298 ccw(c103.901,98.697) v1@104.258,98.518 ; 103.901,98.298 ccw(c103.901,98.697) v1@104.258,98.518 ; v1@104.411,98.543 ccw(c105.002,99.135) 105.002,98.298 ; v1@104.411,98.543 ccw(c105.002,99.135) 105.002,98.298 ; v1@104.411,98.543 ccw(c105.002,99.135) 105.002,98.298 ; v1@104.411,98.543 ccw(c105.002,99.135) 105.002,98.298 ; v1@104.411,98.543 ccw(c105.002,99.135) 105.002,98.298 ; v1@104.554,98.687 ccw(c105.493,99.625) 105.493,98.298 ; v1@104.554,98.687 ccw(c105.493,99.625) 105.493,98.298 ; v1@104.554,98.687 ccw(c105.493,99.625) 105.493,98.298 ; v1@104.554,98.687 ccw(c105.493,99.625) 105.493,98.298 ; v1@104.554,98.687 ccw(c105.493,99.625) 105.493,98.298 ; 112.473,98.63 112.547,98.704 ; 112.473,98.63 112.801,99.898 112.655,98.893 ; 112.503,98.888 cw(c114.332,98.675) U2.d@113.189,100.12 ; 112.503,98.888 cw(c114.332,98.675) U2.d@113.189,100.12 ; 112.503,98.888 cw(c114.332,98.675) U2.d@113.189,100.12 ; 112.503,98.888 cw(c114.332,98.675) U2.d@113.189,100.12 ; 112.503,98.888 cw(c114.332,98.675) U2.d@113.189,100.12 ; 112.547,98.704 112.641,98.798 ; 112.547,98.704 112.655,98.893 ; 112.558,98.96 cw(c114.137,98.551) U2.d@113.31,99.956 ; 112.558,98.96 cw(c114.137,98.551) U2.d@113.31,99.956 ; 112.558,98.96 cw(c114.137,98.551) U2.d@113.31,99.956 ; 112.558,98.96 cw(c114.137,98.551) U2.d@113.31,99.956 ; 112.558,98.96 cw(c114.137,98.551) U2.d@113.31,99.956 ; 112.56,99.376 cw(c113.902,99.22) U2.d@113.063,100.279 ; 112.56,99.376 cw(c113.902,99.22) U2.d@113.063,100.279 ; 112.56,99.376 cw(c113.902,99.22) U2.d@113.063,100.279 ; 112.56,99.376 cw(c113.902,99.22) U2.d@113.063,100.279 ; 112.56,99.376 cw(c113.902,99.22) U2.d@113.063,100.279 ; 112.641,98.798 cw(c113.591,98.29) U2.d@113.401,99.35 ; 112.641,98.798 ccw(c111.691,99.306) U2.d@112.679,99.736 ; 112.641,98.798 cw(c113.591,98.29) U2.d@113.401,99.35 ; 112.641,98.798 ccw(c111.691,99.306) U2.d@112.679,99.736 ; 112.641,98.798 cw(c113.591,98.29) U2.d@113.401,99.35 ; 112.641,98.798 ccw(c111.691,99.306) U2.d@112.679,99.736 ; 112.641,98.798 cw(c113.591,98.29) U2.d@113.401,99.35 ; 112.641,98.798 ccw(c111.691,99.306) U2.d@112.679,99.736 ; 112.641,98.798 ccw(c111.691,99.306) U2.d@112.679,99.736 ; 112.641,98.798 cw(c113.591,98.29) U2.d@113.401,99.35 ; 112.641,98.798 112.674,98.831 ; 112.641,98.798 112.655,98.893 ; 112.641,98.798 U2.d@113.284,100 ; 112.647,98.84 cw(c114.332,98.594) U2.d@113.314,99.959 ; 112.647,98.84 cw(c114.332,98.594) U2.d@113.314,99.959 ; 112.647,98.84 cw(c114.332,98.594) U2.d@113.314,99.959 ; 112.647,98.84 cw(c114.332,98.594) U2.d@113.314,99.959 ; 112.647,98.84 cw(c114.332,98.594) U2.d@113.314,99.959 ; 112.655,98.893 cw(c113.434,98.45) U2.d@113.348,99.343 ; 112.655,98.893 ccw(c111.875,99.337) U2.d@112.687,99.719 ; 112.655,98.893 cw(c113.434,98.45) U2.d@113.348,99.343 ; 112.655,98.893 ccw(c111.875,99.337) U2.d@112.687,99.719 ; 112.655,98.893 cw(c113.434,98.45) U2.d@113.348,99.343 ; 112.655,98.893 ccw(c111.875,99.337) U2.d@112.687,99.719 ; 112.655,98.893 cw(c113.434,98.45) U2.d@113.348,99.343 ; 112.655,98.893 ccw(c111.875,99.337) U2.d@112.687,99.719 ; 112.655,98.893 ccw(c111.875,99.337) U2.d@112.687,99.719 ; 112.655,98.893 cw(c113.434,98.45) U2.d@113.348,99.343 ; 112.655,98.893 U2.d@113.284,100 ; 112.674,98.831 cw(c113.548,98.376) U2.d@113.39,99.348 ; 112.674,98.831 ccw(c111.801,99.287) U2.d@112.689,99.714 ; 112.674,98.831 cw(c113.548,98.376) U2.d@113.39,99.348 ; 112.674,98.831 ccw(c111.801,99.287) U2.d@112.689,99.714 ; 112.674,98.831 cw(c113.548,98.376) U2.d@113.39,99.348 ; 112.674,98.831 ccw(c111.801,99.287) U2.d@112.689,99.714 ; 112.674,98.831 cw(c113.548,98.376) U2.d@113.39,99.348 ; 112.674,98.831 ccw(c111.801,99.287) U2.d@112.689,99.714 ; 112.674,98.831 ccw(c111.801,99.287) U2.d@112.689,99.714 ; 112.674,98.831 cw(c113.548,98.376) U2.d@113.39,99.348 ; 112.674,98.831 113.284,99.441 U2.d@113.284,100 ; 112.674,98.831 U2.d@113.284,100 ; 112.681,99.435 cw(c113.785,99.149) U2.d@113.207,100.131 ; 112.681,99.435 cw(c113.785,99.149) U2.d@113.207,100.131 ; 112.681,99.435 cw(c113.785,99.149) U2.d@113.207,100.131 ; 112.681,99.435 cw(c113.785,99.149) U2.d@113.207,100.131 ; 112.681,99.435 cw(c113.785,99.149) U2.d@113.207,100.131 ; 112.718,99.325 cw(c113.917,99.15) U2.d@113.193,100.122 ; 112.718,99.325 cw(c113.917,99.15) U2.d@113.193,100.122 ; 112.718,99.325 cw(c113.917,99.15) U2.d@113.193,100.122 ; 112.718,99.325 cw(c113.917,99.15) U2.d@113.193,100.122 ; 112.718,99.325 cw(c113.917,99.15) U2.d@113.193,100.122 ; 112.839,99.168 cw(c113.496,98.816) U2.d@113.365,99.55 ; 112.839,99.168 ccw(c112.181,99.52) U2.d@112.865,99.817 ; 112.839,99.168 cw(c113.496,98.816) U2.d@113.365,99.55 ; 112.839,99.168 ccw(c112.181,99.52) U2.d@112.865,99.817 ; 112.839,99.168 cw(c113.496,98.816) U2.d@113.365,99.55 ; 112.839,99.168 ccw(c112.181,99.52) U2.d@112.865,99.817 ; 112.839,99.168 cw(c113.496,98.816) U2.d@113.365,99.55 ; 112.839,99.168 ccw(c112.181,99.52) U2.d@112.865,99.817 ; 112.839,99.168 ccw(c112.181,99.52) U2.d@112.865,99.817 ; 112.839,99.168 cw(c113.496,98.816) U2.d@113.365,99.55 ; 112.848,99.234 cw(c113.388,98.927) U2.d@113.328,99.545 ; 112.848,99.234 ccw(c112.309,99.541) U2.d@112.87,99.805 ; 112.848,99.234 cw(c113.388,98.927) U2.d@113.328,99.545 ; 112.848,99.234 ccw(c112.309,99.541) U2.d@112.87,99.805 ; 112.848,99.234 cw(c113.388,98.927) U2.d@113.328,99.545 ; 112.848,99.234 ccw(c112.309,99.541) U2.d@112.87,99.805 ; 112.848,99.234 cw(c113.388,98.927) U2.d@113.328,99.545 ; 112.848,99.234 ccw(c112.309,99.541) U2.d@112.87,99.805 ; 112.848,99.234 ccw(c112.309,99.541) U2.d@112.87,99.805 ; 112.848,99.234 cw(c113.388,98.927) U2.d@113.328,99.545 ; 112.862,99.191 cw(c113.467,98.876) U2.d@113.357,99.549 ; 112.862,99.191 ccw(c112.257,99.506) U2.d@112.872,99.802 ; 112.862,99.191 cw(c113.467,98.876) U2.d@113.357,99.549 ; 112.862,99.191 ccw(c112.257,99.506) U2.d@112.872,99.802 ; 112.862,99.191 cw(c113.467,98.876) U2.d@113.357,99.549 ; 112.862,99.191 ccw(c112.257,99.506) U2.d@112.872,99.802 ; 112.862,99.191 cw(c113.467,98.876) U2.d@113.357,99.549 ; 112.862,99.191 ccw(c112.257,99.506) U2.d@112.872,99.802 ; 112.862,99.191 ccw(c112.257,99.506) U2.d@112.872,99.802 ; 112.862,99.191 cw(c113.467,98.876) U2.d@113.357,99.549